# Altium PCB Optocouplers.PcbDoc (part 2 of 2)
Units mm, origin at the board's own origin, x right, y up, seen from the top; angles counter-clockwise.
Board outline 43.2 x 24.15 mm, 4 copper layers (Top Layer, Layer 1, Layer 2, Bottom Layer), stack 1.553 mm thick; 116 components, 82 nets, 391 pads, 180 vias.
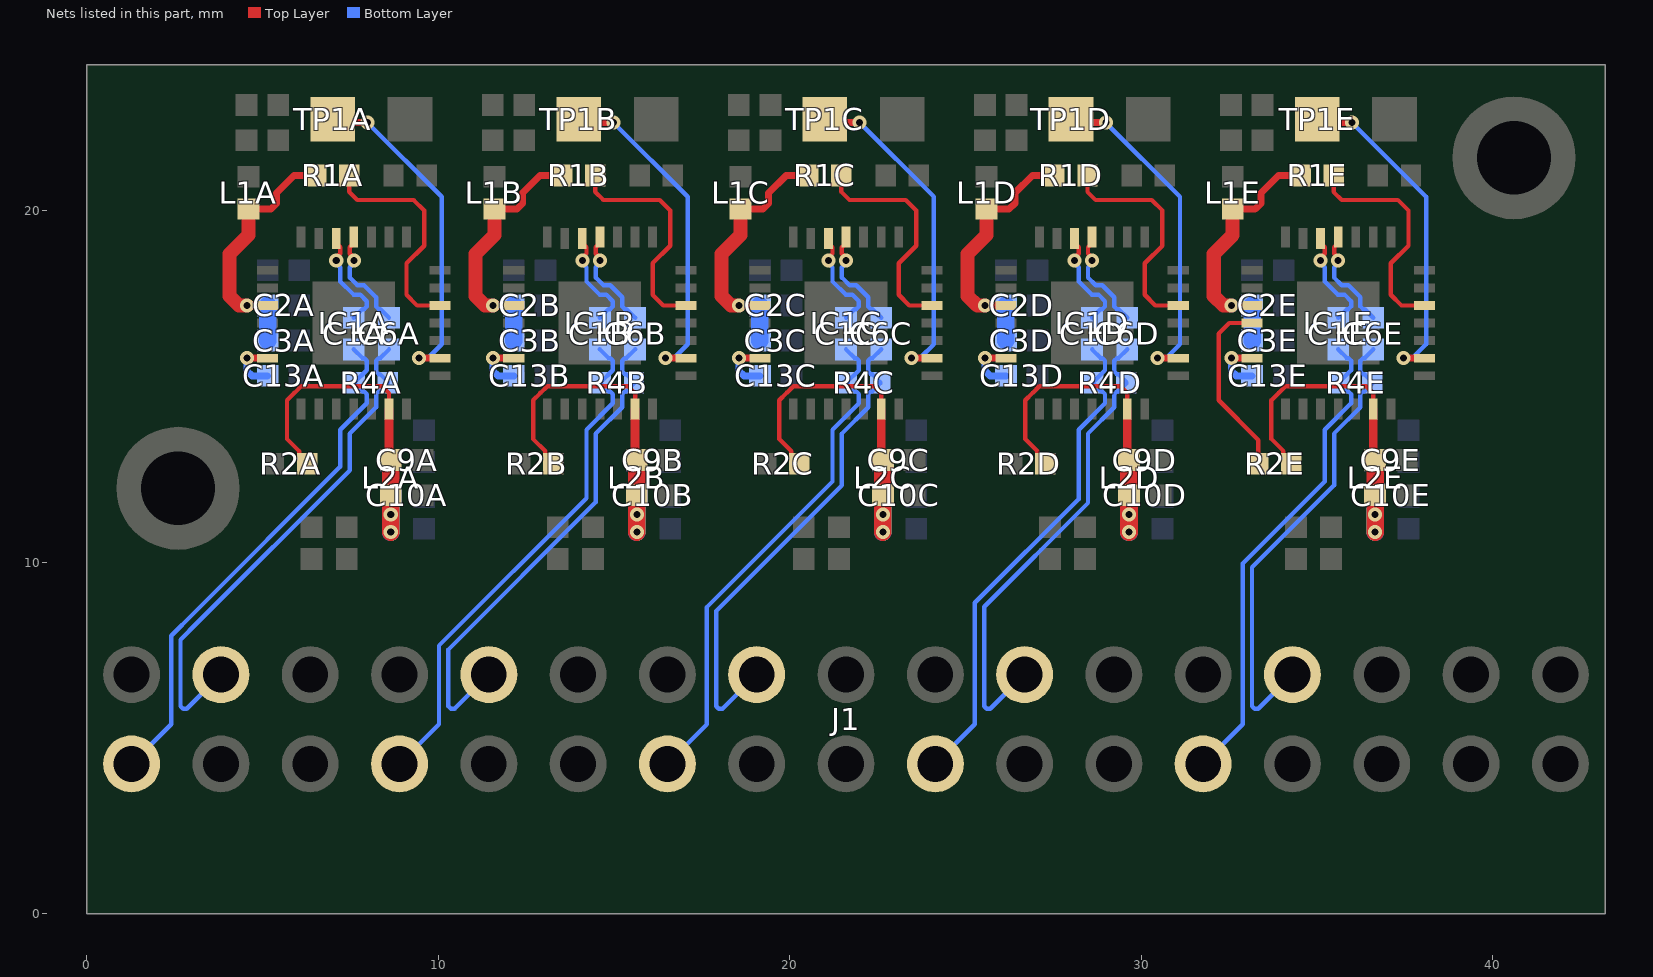
[diagram p4: the nets of this part, all layers, seen from the top]

## Via types
v1: diameter 0.4, hole 0.2, Top Layer to Bottom Layer, tented both sides, 180 vias

## Nets (pads, with @x,y where several pads share a name; then routed paths per layer and width w, separated by ;. In a path a pad name is that pad's centre, name@x,y a point inside that pad or via, vN(x,y) a via of type N, cw(c..) or ccw(c..) an arc to the next point about the centre after c; other vN are vias at no path point) (continued)
RX_ENE: IC1E.25 R2E.2 | length 5.2
  Top Layer w0.125: IC1E.25@33.15,16.8 32.5,16.8 32.2,16.5 32.2,15.953 32.197,15.95 32.197,15.65 32.2,15.647 32.2,14.6 33.33,13.47 R2E.2@33.33,12.8
SDA: IC1A.9 TP1A.1 | length 9.6
  Top Layer w0.2: TP1A.1@7,22.5 v1(7.99,22.5) ; v1(9.46,15.8) IC1A.9@10.05,15.8
  Bottom Layer w0.125: v1(7.99,22.5) 10.1,20.39 10.1,16.2 9.729,15.829 9.489,15.829 v1(9.46,15.8)
SDB: IC1B.9 TP1B.1 | length 9.6
  Top Layer w0.2: TP1B.1@14,22.5 v1(14.99,22.5) ; v1(16.46,15.8) IC1B.9@17.05,15.8
  Bottom Layer w0.125: v1(14.99,22.5) 17.1,20.39 17.1,16.2 16.729,15.829 16.489,15.829 v1(16.46,15.8)
SDC: IC1C.9 TP1C.1 | length 9.6
  Top Layer w0.2: TP1C.1@21,22.5 v1(21.99,22.5) ; v1(23.46,15.8) IC1C.9@24.05,15.8
  Bottom Layer w0.125: v1(21.99,22.5) 24.1,20.39 24.1,16.2 23.729,15.829 23.489,15.829 v1(23.46,15.8)
SDD: IC1D.9 TP1D.1 | length 9.6
  Top Layer w0.2: TP1D.1@28,22.5 v1(28.99,22.5) ; v1(30.46,15.8) IC1D.9@31.05,15.8
  Bottom Layer w0.125: v1(28.99,22.5) 31.1,20.39 31.1,16.2 30.729,15.829 30.489,15.829 v1(30.46,15.8)
SDE: IC1E.9 TP1E.1 | length 9.6
  Top Layer w0.2: TP1E.1@35,22.5 v1(35.99,22.5) ; v1(37.46,15.8) IC1E.9@38.05,15.8
  Bottom Layer w0.125: v1(35.99,22.5) 38.1,20.39 38.1,16.2 37.729,15.829 37.489,15.829 v1(37.46,15.8)
TX_1_N: C6A.2 J1.3 R4A.1 | length 14.5
  Bottom Layer w0.125: J1.3@3.82,6.8 2.847,5.827 2.743,5.827 2.67,5.9 2.67,7.794 3.163,8.287 7.483,12.607 7.483,13.656 8.233,14.406 8.233,14.779 8.306,14.853 8.343,14.853 8.57,15.08 8.57,15.12 8.343,15.347 8.306,15.347 8.233,15.421 8.233,15.729 8.306,15.803 8.353,15.803 C6A.2@8.6,16.05
TX_1_P: C1A.2 J1.2 R4A.2 | length 15
  Bottom Layer w0.125: J1.2@1.28,4.26 2.404,5.384 2.404,7.904 3.053,8.552 7.217,12.717 7.217,13.766 7.967,14.516 7.967,14.779 7.894,14.853 7.857,14.853 7.63,15.08 7.63,15.12 7.967,15.457 7.967,15.729 7.894,15.803 7.847,15.803 C1A.2@7.6,16.05
TX_2_N: C6B.2 J1.9 R4B.1 | length 14.3
  Bottom Layer w0.125: J1.9@11.44,6.8 10.467,5.827 10.363,5.827 10.29,5.9 10.29,7.514 14.483,11.707 14.483,13.656 15.233,14.406 15.233,14.779 15.306,14.853 15.343,14.853 15.57,15.08 15.57,15.12 15.343,15.347 15.306,15.347 15.233,15.421 15.233,15.729 15.306,15.803 15.353,15.803 C6B.2@15.6,16.05
TX_2_P: C1B.2 J1.8 R4B.2 | length 14.8
  Bottom Layer w0.125: J1.8@8.9,4.26 10.024,5.384 10.024,7.624 14.217,11.817 14.217,13.766 14.967,14.516 14.967,14.779 14.894,14.853 14.857,14.853 14.63,15.08 14.63,15.12 14.967,15.457 14.967,15.729 14.894,15.803 14.847,15.803 C1B.2@14.6,16.05
TX_3_N: C6C.2 J1.15 R4C.1 | length 14
  Bottom Layer w0.125: J1.15@19.06,6.8 18.087,5.827 17.983,5.827 17.91,5.9 17.91,8.61 21.483,12.183 21.483,13.656 22.233,14.406 22.233,14.779 22.306,14.853 22.343,14.853 22.57,15.08 22.57,15.12 22.343,15.347 22.306,15.347 22.233,15.421 22.233,15.729 22.306,15.803 22.353,15.803 C6C.2@22.6,16.05
TX_3_P: C1C.2 J1.14 R4C.2 | length 14.5
  Bottom Layer w0.125: J1.14@16.52,4.26 17.644,5.384 17.644,8.72 21.217,12.293 21.217,13.766 21.967,14.516 21.967,14.779 21.894,14.853 21.857,14.853 21.63,15.08 21.63,15.12 21.967,15.457 21.967,15.729 21.894,15.803 21.847,15.803 C1C.2@21.6,16.05
TX_4_N: C6D.2 J1.21 R4D.1 | length 13.8
  Bottom Layer w0.125: J1.21@26.68,6.8 25.707,5.827 25.603,5.827 25.53,5.9 25.53,8.73 28.483,11.683 28.483,13.656 29.233,14.406 29.233,14.779 29.306,14.853 29.343,14.853 29.57,15.08 29.57,15.12 29.343,15.347 29.306,15.347 29.233,15.421 29.233,15.729 29.306,15.803 29.353,15.803 C6D.2@29.6,16.05
TX_4_P: C1D.2 J1.20 R4D.2 | length 14.3
  Bottom Layer w0.125: J1.20@24.14,4.26 25.264,5.384 25.264,8.84 28.217,11.793 28.217,13.766 28.967,14.516 28.967,14.779 28.894,14.853 28.857,14.853 28.63,15.08 28.63,15.12 28.967,15.457 28.967,15.729 28.894,15.803 28.847,15.803 C1D.2@28.6,16.05
TX_5_N: C6E.2 J1.27 R4E.1 | length 13.5
  Bottom Layer w0.125: J1.27@34.3,6.8 33.327,5.827 33.223,5.827 33.15,5.9 33.15,9.85 35.483,12.183 35.483,13.656 36.233,14.406 36.233,14.779 36.306,14.853 36.343,14.853 36.57,15.08 36.57,15.12 36.343,15.347 36.306,15.347 36.233,15.421 36.233,15.729 36.306,15.803 36.353,15.803 C6E.2@36.6,16.05
TX_5_P: C1E.2 J1.26 R4E.2 | length 14
  Bottom Layer w0.125: J1.26@31.76,4.26 32.884,5.384 32.884,9.96 35.217,12.293 35.217,13.766 35.967,14.516 35.967,14.779 35.894,14.853 35.857,14.853 35.63,15.08 35.63,15.12 35.967,15.457 35.967,15.729 35.894,15.803 35.847,15.803 C1E.2@35.6,16.05
TX_CA_N: C6A.1 IC1A.18 | length 3
  Top Layer w0.125: v1(7.6,18.578) 7.6,18.652 7.483,18.77 7.483,18.958 7.6,19.075 IC1A.18@7.6,19.25
  Bottom Layer w0.125: v1(7.6,18.578) 7.6,18.504 7.483,18.386 7.483,18.093 7.701,17.874 7.891,17.874 8.233,17.532 8.233,17.271 8.306,17.197 8.353,17.197 C6A.1@8.6,16.95
TX_CA_P: C1A.1 IC1A.19 | length 3
  Top Layer w0.125: v1(7.1,18.578) 7.1,18.652 7.217,18.77 7.217,18.958 7.1,19.075 IC1A.19@7.1,19.25
  Bottom Layer w0.125: v1(7.1,18.578) 7.1,18.504 7.217,18.386 7.217,17.983 7.591,17.609 7.781,17.609 7.967,17.422 7.967,17.271 7.894,17.197 7.847,17.197 C1A.1@7.6,16.95
TX_CB_N: C6B.1 IC1B.18 | length 3
  Top Layer w0.125: v1(14.6,18.578) 14.6,18.652 14.483,18.77 14.483,18.958 14.6,19.075 IC1B.18@14.6,19.25
  Bottom Layer w0.125: v1(14.6,18.578) 14.6,18.504 14.483,18.386 14.483,18.093 14.701,17.874 14.891,17.874 15.233,17.532 15.233,17.271 15.306,17.197 15.353,17.197 C6B.1@15.6,16.95
TX_CB_P: C1B.1 IC1B.19 | length 3
  Top Layer w0.125: v1(14.1,18.578) 14.1,18.652 14.217,18.77 14.217,18.958 14.1,19.075 IC1B.19@14.1,19.25
  Bottom Layer w0.125: v1(14.1,18.578) 14.1,18.504 14.217,18.386 14.217,17.983 14.591,17.609 14.781,17.609 14.967,17.422 14.967,17.271 14.894,17.197 14.847,17.197 C1B.1@14.6,16.95
TX_CC_N: C6C.1 IC1C.18 | length 3
  Top Layer w0.125: v1(21.6,18.578) 21.6,18.652 21.483,18.77 21.483,18.958 21.6,19.075 IC1C.18@21.6,19.25
  Bottom Layer w0.125: v1(21.6,18.578) 21.6,18.504 21.483,18.386 21.483,18.093 21.701,17.874 21.891,17.874 22.233,17.532 22.233,17.271 22.306,17.197 22.353,17.197 C6C.1@22.6,16.95
TX_CC_P: C1C.1 IC1C.19 | length 3
  Top Layer w0.125: v1(21.1,18.578) 21.1,18.652 21.217,18.77 21.217,18.958 21.1,19.075 IC1C.19@21.1,19.25
  Bottom Layer w0.125: v1(21.1,18.578) 21.1,18.504 21.217,18.386 21.217,17.983 21.591,17.609 21.781,17.609 21.967,17.422 21.967,17.271 21.894,17.197 21.847,17.197 C1C.1@21.6,16.95
TX_CD_N: C6D.1 IC1D.18 | length 3
  Top Layer w0.125: v1(28.6,18.578) 28.6,18.652 28.483,18.77 28.483,18.958 28.6,19.075 IC1D.18@28.6,19.25
  Bottom Layer w0.125: v1(28.6,18.578) 28.6,18.504 28.483,18.386 28.483,18.093 28.701,17.874 28.891,17.874 29.233,17.532 29.233,17.271 29.306,17.197 29.353,17.197 C6D.1@29.6,16.95
TX_CD_P: C1D.1 IC1D.19 | length 3
  Top Layer w0.125: v1(28.1,18.578) 28.1,18.652 28.217,18.77 28.217,18.958 28.1,19.075 IC1D.19@28.1,19.25
  Bottom Layer w0.125: v1(28.1,18.578) 28.1,18.504 28.217,18.386 28.217,17.983 28.591,17.609 28.781,17.609 28.967,17.422 28.967,17.271 28.894,17.197 28.847,17.197 C1D.1@28.6,16.95
TX_CE_N: C6E.1 IC1E.18 | length 3
  Top Layer w0.125: v1(35.6,18.578) 35.6,18.652 35.483,18.77 35.483,18.958 35.6,19.075 IC1E.18@35.6,19.25
  Bottom Layer w0.125: v1(35.6,18.578) 35.6,18.504 35.483,18.386 35.483,18.093 35.701,17.874 35.891,17.874 36.233,17.532 36.233,17.271 36.306,17.197 36.353,17.197 C6E.1@36.6,16.95
TX_CE_P: C1E.1 IC1E.19 | length 3
  Top Layer w0.125: v1(35.1,18.578) 35.1,18.652 35.217,18.77 35.217,18.958 35.1,19.075 IC1E.19@35.1,19.25
  Bottom Layer w0.125: v1(35.1,18.578) 35.1,18.504 35.217,18.386 35.217,17.983 35.591,17.609 35.781,17.609 35.967,17.422 35.967,17.271 35.894,17.197 35.847,17.197 C1E.1@35.6,16.95
TX_ENA: IC1A.12 R1A.2 | length 6.5
  Top Layer w0.125: R1A.2@7.47,21 7.47,20.53 7.7,20.3 9.3,20.3 9.6,20 9.6,19 9.098,18.498 9.098,17.602 9.4,17.3 IC1A.12@10.05,17.3
TX_ENB: IC1B.12 R1B.2 | length 6.5
  Top Layer w0.125: R1B.2@14.47,21 14.47,20.53 14.7,20.3 16.3,20.3 16.6,20 16.6,19 16.098,18.498 16.098,17.602 16.4,17.3 IC1B.12@17.05,17.3
TX_ENC: IC1C.12 R1C.2 | length 6.5
  Top Layer w0.125: R1C.2@21.47,21 21.47,20.53 21.7,20.3 23.3,20.3 23.6,20 23.6,19 23.098,18.498 23.098,17.602 23.4,17.3 IC1C.12@24.05,17.3
TX_END: IC1D.12 R1D.2 | length 6.5
  Top Layer w0.125: R1D.2@28.47,21 28.47,20.53 28.7,20.3 30.3,20.3 30.6,20 30.6,19 30.098,18.498 30.098,17.602 30.4,17.3 IC1D.12@31.05,17.3
TX_ENE: IC1E.12 R1E.2 | length 6.5
  Top Layer w0.125: R1E.2@35.47,21 35.47,20.53 35.7,20.3 37.3,20.3 37.6,20 37.6,19 37.098,18.498 37.098,17.602 37.4,17.3 IC1E.12@38.05,17.3
VDD15A: C13A.2 IC1A.27 | length 1.6
  Top Layer w0.2: v1(4.56,15.8) IC1A.27@5.15,15.8
  Bottom Layer w0.2: v1(4.56,15.8) 4.56,15.44 4.7,15.3 C13A.2@5.15,15.3
VDD15B: C13B.2 IC1B.27 | length 1.6
  Top Layer w0.2: v1(11.56,15.8) IC1B.27@12.15,15.8
  Bottom Layer w0.2: v1(11.56,15.8) 11.56,15.44 11.7,15.3 C13B.2@12.15,15.3
VDD15C: C13C.2 IC1C.27 | length 1.6
  Top Layer w0.2: v1(18.56,15.8) IC1C.27@19.15,15.8
  Bottom Layer w0.2: v1(18.56,15.8) 18.56,15.44 18.7,15.3 C13C.2@19.15,15.3
VDD15D: C13D.2 IC1D.27 | length 1.6
  Top Layer w0.2: v1(25.56,15.8) IC1D.27@26.15,15.8
  Bottom Layer w0.2: v1(25.56,15.8) 25.56,15.44 25.7,15.3 C13D.2@26.15,15.3
VDD15E: C13E.2 IC1E.27 | length 1.6
  Top Layer w0.2: v1(32.56,15.8) IC1E.27@33.15,15.8
  Bottom Layer w0.2: v1(32.56,15.8) 32.56,15.44 32.7,15.3 C13E.2@33.15,15.3
VDD_RXA: C9A.2 C10A.2 IC1A.6 L2A.1 R2A.1 | length 10.3
  Top Layer w0.125: R2A.1@6.27,12.8 6.043,13.027 6.043,13.157 5.7,13.5 5.7,14.605 5.908,14.812 5.912,14.812 6.1,15 8.4,15 8.6,14.8 IC1A.6@8.6,14.35
  Top Layer w0.25: IC1A.6@8.6,14.35 8.6,12.95 C9A.2@8.65,12.9
  Top Layer w0.5: v1(8.65,10.85) v1(8.65,11.35) C10A.2@8.65,11.9 C9A.2@8.65,12.9
  Bottom Layer w0.5: L2A.1@8.6,11.94 8.65,11.89 v1(8.65,11.35) v1(8.65,10.85)
VDD_RXB: C9B.2 C10B.2 IC1B.6 L2B.1 R2B.1 | length 10.3
  Top Layer w0.125: R2B.1@13.27,12.8 13.043,13.027 13.043,13.157 12.7,13.5 12.7,14.605 12.908,14.812 12.912,14.812 13.1,15 15.4,15 15.6,14.8 IC1B.6@15.6,14.35
  Top Layer w0.25: IC1B.6@15.6,14.35 15.6,12.95 C9B.2@15.65,12.9
  Top Layer w0.5: v1(15.65,10.85) v1(15.65,11.35) C10B.2@15.65,11.9 C9B.2@15.65,12.9
  Bottom Layer w0.5: L2B.1@15.6,11.94 15.65,11.89 v1(15.65,11.35) v1(15.65,10.85)
VDD_RXC: C9C.2 C10C.2 IC1C.6 L2C.1 R2C.1 | length 10.3
  Top Layer w0.125: R2C.1@20.27,12.8 20.043,13.027 20.043,13.157 19.7,13.5 19.7,14.605 19.908,14.812 19.912,14.812 20.1,15 22.4,15 22.6,14.8 IC1C.6@22.6,14.35
  Top Layer w0.25: IC1C.6@22.6,14.35 22.6,12.95 C9C.2@22.65,12.9
  Top Layer w0.5: v1(22.65,10.85) v1(22.65,11.35) C10C.2@22.65,11.9 C9C.2@22.65,12.9
  Bottom Layer w0.5: L2C.1@22.6,11.94 22.65,11.89 v1(22.65,11.35) v1(22.65,10.85)
VDD_RXD: C9D.2 C10D.2 IC1D.6 L2D.1 R2D.1 | length 10.3
  Top Layer w0.125: R2D.1@27.27,12.8 27.043,13.027 27.043,13.157 26.7,13.5 26.7,14.605 26.908,14.812 26.912,14.812 27.1,15 29.4,15 29.6,14.8 IC1D.6@29.6,14.35
  Top Layer w0.25: IC1D.6@29.6,14.35 29.6,12.95 C9D.2@29.65,12.9
  Top Layer w0.5: v1(29.65,10.85) v1(29.65,11.35) C10D.2@29.65,11.9 C9D.2@29.65,12.9
  Bottom Layer w0.5: L2D.1@29.6,11.94 29.65,11.89 v1(29.65,11.35) v1(29.65,10.85)
VDD_RXE: C9E.2 C10E.2 IC1E.6 L2E.1 R2E.1 | length 10.3
  Top Layer w0.125: R2E.1@34.27,12.8 34.043,13.027 34.043,13.157 33.7,13.5 33.7,14.605 33.908,14.812 33.912,14.812 34.1,15 36.4,15 36.6,14.8 IC1E.6@36.6,14.35
  Top Layer w0.25: IC1E.6@36.6,14.35 36.6,12.95 C9E.2@36.65,12.9
  Top Layer w0.5: v1(36.65,10.85) v1(36.65,11.35) C10E.2@36.65,11.9 C9E.2@36.65,12.9
  Bottom Layer w0.5: L2E.1@36.6,11.94 36.65,11.89 v1(36.65,11.35) v1(36.65,10.85)
VDD_TXA: C2A.2 C3A.2 IC1A.24 L1A.1 R1A.1 | length 8
  Top Layer w0.2: v1(4.56,17.3) IC1A.24@5.15,17.3 ; L1A.1@4.6,20.04 5.24,20.04 5.4,20.2 5.4,20.5 5.9,21 R1A.1@6.53,21
  Top Layer w0.4: v1(4.56,17.3) 4.334,17.3 4.06,17.574 4.06,18.76 4.6,19.3 L1A.1@4.6,20.04
  Bottom Layer w0.2: v1(4.56,17.3) C2A.2@5.15,17.3
  Bottom Layer w0.5: C3A.2@5.15,16.3 C2A.2@5.15,17.3
VDD_TXB: C2B.2 C3B.2 IC1B.24 L1B.1 R1B.1 | length 8
  Top Layer w0.2: v1(11.56,17.3) IC1B.24@12.15,17.3 ; L1B.1@11.6,20.04 12.24,20.04 12.4,20.2 12.4,20.5 12.9,21 R1B.1@13.53,21
  Top Layer w0.4: v1(11.56,17.3) 11.334,17.3 11.06,17.574 11.06,18.76 11.6,19.3 L1B.1@11.6,20.04
  Bottom Layer w0.2: v1(11.56,17.3) C2B.2@12.15,17.3
  Bottom Layer w0.5: C3B.2@12.15,16.3 C2B.2@12.15,17.3
VDD_TXC: C2C.2 C3C.2 IC1C.24 L1C.1 R1C.1 | length 8
  Top Layer w0.2: v1(18.56,17.3) IC1C.24@19.15,17.3 ; L1C.1@18.6,20.04 19.24,20.04 19.4,20.2 19.4,20.5 19.9,21 R1C.1@20.53,21
  Top Layer w0.4: v1(18.56,17.3) 18.334,17.3 18.06,17.574 18.06,18.76 18.6,19.3 L1C.1@18.6,20.04
  Bottom Layer w0.2: v1(18.56,17.3) C2C.2@19.15,17.3
  Bottom Layer w0.5: C3C.2@19.15,16.3 C2C.2@19.15,17.3
VDD_TXD: C2D.2 C3D.2 IC1D.24 L1D.1 R1D.1 | length 8
  Top Layer w0.2: v1(25.56,17.3) IC1D.24@26.15,17.3 ; L1D.1@25.6,20.04 26.24,20.04 26.4,20.2 26.4,20.5 26.9,21 R1D.1@27.53,21
  Top Layer w0.4: v1(25.56,17.3) 25.334,17.3 25.06,17.574 25.06,18.76 25.6,19.3 L1D.1@25.6,20.04
  Bottom Layer w0.2: v1(25.56,17.3) C2D.2@26.15,17.3
  Bottom Layer w0.5: C3D.2@26.15,16.3 C2D.2@26.15,17.3
VDD_TXE: C2E.2 C3E.2 IC1E.24 L1E.1 R1E.1 | length 8
  Top Layer w0.2: v1(32.56,17.3) IC1E.24@33.15,17.3 ; L1E.1@32.6,20.04 33.24,20.04 33.4,20.2 33.4,20.5 33.9,21 R1E.1@34.53,21
  Top Layer w0.4: v1(32.56,17.3) 32.334,17.3 32.06,17.574 32.06,18.76 32.6,19.3 L1E.1@32.6,20.04
  Bottom Layer w0.2: v1(32.56,17.3) C2E.2@33.15,17.3
  Bottom Layer w0.5: C3E.2@33.15,16.3 C2E.2@33.15,17.3
pads on no net: IC1A.11 IC1A.13 IC1A.16 IC1A.26 IC1B.11 IC1B.13 IC1B.16 IC1B.26 IC1C.11 IC1C.13 IC1C.16 IC1C.26 IC1D.11 IC1D.13 IC1D.16 IC1D.26 IC1E.11 IC1E.13 IC1E.16 IC1E.26

## Polygon pours and split planes (outlines as drawn)
GND on Bottom Layer "GND_L04_P013" (solid, pour order 13): 34.36,15.425 34.535,15.6 34.7,15.6 34.9,15.8 34.9,17.9 34.8,18 34.6,18 34.36,18.24 34.36,18.61 33.74,18.61 33.74,14.99 34.36,14.99
GND on Bottom Layer "GND_L04_P031" (solid, pour order 31): 37.29,11.26 37.29,10.59 37.1,10.4 36.6,10.4 36.5,10.3 36.5,9.9 36.6,9.8 37.8,9.8 37.91,9.91 37.91,11.26
P3V3 on Bottom Layer "P3V3_L04_P040" (solid, pour order 40): 36.29,13.16 36.29,12.56 36.91,12.56 37.29,12.18 37.29,11.54 38.34,11.54 38.5,11.7 38.5,13 38.34,13.16 37.91,13.16
GND on Bottom Layer "GND_L04_P012" (solid, pour order 12): 27.36,15.425 27.535,15.6 27.7,15.6 27.9,15.8 27.9,17.9 27.8,18 27.6,18 27.36,18.24 27.36,18.61 26.74,18.61 26.74,14.99 27.36,14.99
GND on Bottom Layer "GND_L04_P030" (solid, pour order 30): 30.29,11.26 30.29,10.59 30.1,10.4 29.6,10.4 29.5,10.3 29.5,9.9 29.6,9.8 30.8,9.8 30.91,9.91 30.91,11.26
P3V3 on Bottom Layer "P3V3_L04_P039" (solid, pour order 39): 29.29,13.16 29.29,12.56 29.91,12.56 30.29,12.18 30.29,11.54 31.34,11.54 31.5,11.7 31.5,13 31.34,13.16 30.91,13.16
GND on Bottom Layer "GND_L04_P011" (solid, pour order 11): 20.36,15.425 20.535,15.6 20.7,15.6 20.9,15.8 20.9,17.9 20.8,18 20.6,18 20.36,18.24 20.36,18.61 19.74,18.61 19.74,14.99 20.36,14.99
GND on Bottom Layer "GND_L04_P029" (solid, pour order 29): 23.29,11.26 23.29,10.59 23.1,10.4 22.6,10.4 22.5,10.3 22.5,9.9 22.6,9.8 23.8,9.8 23.91,9.91 23.91,11.26
P3V3 on Bottom Layer "P3V3_L04_P038" (solid, pour order 38): 22.29,13.16 22.29,12.56 22.91,12.56 23.29,12.18 23.29,11.54 24.34,11.54 24.5,11.7 24.5,13 24.34,13.16 23.91,13.16
GND on Bottom Layer "GND_L04_P010" (solid, pour order 10): 13.36,15.425 13.535,15.6 13.7,15.6 13.9,15.8 13.9,17.9 13.8,18 13.6,18 13.36,18.24 13.36,18.61 12.74,18.61 12.74,14.99 13.36,14.99
GND on Bottom Layer "GND_L04_P028" (solid, pour order 28): 16.29,11.26 16.29,10.59 16.1,10.4 15.6,10.4 15.5,10.3 15.5,9.9 15.6,9.8 16.8,9.8 16.91,9.91 16.91,11.26
P3V3 on Bottom Layer "P3V3_L04_P037" (solid, pour order 37): 15.29,13.16 15.29,12.56 15.91,12.56 16.29,12.18 16.29,11.54 17.34,11.54 17.5,11.7 17.5,13 17.34,13.16 16.91,13.16
P3V3 on Bottom Layer "P3V3_L04_P036" (solid, pour order 36): 36.29,13.16 36.29,12.56 36.91,12.56 37.29,12.18 37.29,11.54 38.34,11.54 38.5,11.7 38.5,13 38.34,13.16 37.91,13.16
GND on Bottom Layer "GND_L04_P009" (solid, pour order 9): 34.36,15.425 34.535,15.6 34.7,15.6 34.9,15.8 34.9,17.9 34.8,18 34.6,18 34.36,18.24 34.36,18.61 33.74,18.61 33.74,14.99 34.36,14.99
GND on Bottom Layer "GND_L04_P027" (solid, pour order 27): 37.29,11.26 37.29,10.59 37.1,10.4 36.6,10.4 36.5,10.3 36.5,9.9 36.6,9.8 37.8,9.8 37.91,9.91 37.91,11.26
P3V3 on Bottom Layer "P3V3_L04_P035" (solid, pour order 35): 29.29,13.16 29.29,12.56 29.91,12.56 30.29,12.18 30.29,11.54 31.34,11.54 31.5,11.7 31.5,13 31.34,13.16 30.91,13.16
GND on Bottom Layer "GND_L04_P008" (solid, pour order 8): 27.36,15.425 27.535,15.6 27.7,15.6 27.9,15.8 27.9,17.9 27.8,18 27.6,18 27.36,18.24 27.36,18.61 26.74,18.61 26.74,14.99 27.36,14.99
GND on Bottom Layer "GND_L04_P026" (solid, pour order 26): 30.29,11.26 30.29,10.59 30.1,10.4 29.6,10.4 29.5,10.3 29.5,9.9 29.6,9.8 30.8,9.8 30.91,9.91 30.91,11.26
P3V3 on Bottom Layer "P3V3_L04_P034" (solid, pour order 34): 22.29,13.16 22.29,12.56 22.91,12.56 23.29,12.18 23.29,11.54 24.34,11.54 24.5,11.7 24.5,13 24.34,13.16 23.91,13.16
GND on Bottom Layer "GND_L04_P007" (solid, pour order 7): 20.36,15.425 20.535,15.6 20.7,15.6 20.9,15.8 20.9,17.9 20.8,18 20.6,18 20.36,18.24 20.36,18.61 19.74,18.61 19.74,14.99 20.36,14.99
GND on Bottom Layer "GND_L04_P025" (solid, pour order 25): 23.29,11.26 23.29,10.59 23.1,10.4 22.6,10.4 22.5,10.3 22.5,9.9 22.6,9.8 23.8,9.8 23.91,9.91 23.91,11.26
P3V3 on Bottom Layer "P3V3_L04_P033" (solid, pour order 33): 15.29,13.16 15.29,12.56 15.91,12.56 16.29,12.18 16.29,11.54 17.34,11.54 17.5,11.7 17.5,13 17.34,13.16 16.91,13.16
GND on Bottom Layer "GND_L04_P006" (solid, pour order 6): 13.36,15.425 13.535,15.6 13.7,15.6 13.9,15.8 13.9,17.9 13.8,18 13.6,18 13.36,18.24 13.36,18.61 12.74,18.61 12.74,14.99 13.36,14.99
GND on Bottom Layer "GND_L04_P024" (solid, pour order 24): 16.29,11.26 16.29,10.59 16.1,10.4 15.6,10.4 15.5,10.3 15.5,9.9 15.6,9.8 16.8,9.8 16.91,9.91 16.91,11.26
P3V3 on Bottom Layer "P3V3_L04_P032" (solid, pour order 32): 8.29,13.16 8.29,12.56 8.91,12.56 9.29,12.18 9.29,11.54 10.34,11.54 10.5,11.7 10.5,13 10.34,13.16 9.91,13.16
GND on Bottom Layer "GND_L04_P023" (solid, pour order 23): 9.29,11.26 9.29,10.59 9.1,10.4 8.6,10.4 8.5,10.3 8.5,9.9 8.6,9.8 9.8,9.8 9.91,9.91 9.91,11.26
GND on Bottom Layer "GND_L04_P005" (solid, pour order 5): 6.36,15.425 6.535,15.6 6.7,15.6 6.9,15.8 6.9,17.9 6.8,18 6.6,18 6.36,18.24 6.36,18.61 5.74,18.61 5.74,14.99 6.36,14.99
GND on Top Layer "GND_L01_P022" (solid, pour order 22): 37.72,9.8 37.86,9.94 37.86,14.44 37.65,14.65 36.975,14.65 36.975,13.475 37.24,13.21 37.24,10.54 37.1,10.4 36.6,10.4 36.5,10.3 36.5,9.9 36.6,9.8
P3V3 on Top Layer "P3V3_L01_P045" (solid, pour order 45): 32.91,20.66 32.91,21.64 32.86,21.69 32.86,23.31 31.51,23.31 31.4,23.2 31.4,21.9 31.6,21.7 32.23,21.7 32.29,21.64 32.29,20.66
GND on Top Layer "GND_L01_P021" (solid, pour order 21): 30.72,9.8 30.86,9.94 30.86,14.44 30.65,14.65 29.975,14.65 29.975,13.475 30.24,13.21 30.24,10.54 30.1,10.4 29.6,10.4 29.5,10.3 29.5,9.9 29.6,9.8
P3V3 on Top Layer "P3V3_L01_P044" (solid, pour order 44): 25.91,20.66 25.91,21.64 25.86,21.69 25.86,23.31 24.51,23.31 24.4,23.2 24.4,21.9 24.6,21.7 25.23,21.7 25.29,21.64 25.29,20.66
GND on Top Layer "GND_L01_P020" (solid, pour order 20): 23.72,9.8 23.86,9.94 23.86,14.44 23.65,14.65 22.975,14.65 22.975,13.475 23.24,13.21 23.24,10.54 23.1,10.4 22.6,10.4 22.5,10.3 22.5,9.9 22.6,9.8
P3V3 on Top Layer "P3V3_L01_P043" (solid, pour order 43): 18.91,20.66 18.91,21.64 18.86,21.69 18.86,23.31 17.51,23.31 17.4,23.2 17.4,21.9 17.6,21.7 18.23,21.7 18.29,21.64 18.29,20.66
GND on Top Layer "GND_L01_P019" (solid, pour order 19): 16.72,9.8 16.86,9.94 16.86,14.44 16.65,14.65 15.975,14.65 15.975,13.475 16.24,13.21 16.24,10.54 16.1,10.4 15.6,10.4 15.5,10.3 15.5,9.9 15.6,9.8
P3V3 on Top Layer "P3V3_L01_P042" (solid, pour order 42): 11.91,20.66 11.91,21.64 11.86,21.69 11.86,23.31 10.51,23.31 10.4,23.2 10.4,21.9 10.6,21.7 11.23,21.7 11.29,21.64 11.29,20.66
P3V3 on Top Layer "P3V3_L01_P041" (solid, pour order 41): 4.91,20.66 4.91,21.64 4.86,21.69 4.86,23.31 3.51,23.31 3.4,23.2 3.4,21.9 3.6,21.7 4.23,21.7 4.29,21.64 4.29,20.66
GND on Top Layer "GND_L01_P018" (solid, pour order 18): 37.72,9.8 37.86,9.94 37.86,14.44 37.65,14.65 36.975,14.65 36.975,13.475 37.24,13.21 37.24,10.54 37.1,10.4 36.6,10.4 36.5,10.3 36.5,9.9 36.6,9.8
GND on Top Layer "GND_L01_P017" (solid, pour order 17): 30.72,9.8 30.86,9.94 30.86,14.44 30.65,14.65 29.975,14.65 29.975,13.475 30.24,13.21 30.24,10.54 30.1,10.4 29.6,10.4 29.5,10.3 29.5,9.9 29.6,9.8
GND on Top Layer "GND_L01_P016" (solid, pour order 16): 23.72,9.8 23.86,9.94 23.86,14.44 23.65,14.65 22.975,14.65 22.975,13.475 23.24,13.21 23.24,10.54 23.1,10.4 22.6,10.4 22.5,10.3 22.5,9.9 22.6,9.8
GND on Top Layer "GND_L01_P015" (solid, pour order 15): 16.72,9.8 16.86,9.94 16.86,14.44 16.65,14.65 15.975,14.65 15.975,13.475 16.24,13.21 16.24,10.54 16.1,10.4 15.6,10.4 15.5,10.3 15.5,9.9 15.6,9.8
GND on Top Layer "GND_L01_P014" (solid, pour order 14): 9.72,9.8 9.86,9.94 9.86,14.44 9.65,14.65 8.975,14.65 8.975,13.475 9.24,13.21 9.24,10.54 9.1,10.4 8.6,10.4 8.5,10.3 8.5,9.9 8.6,9.8
GND on Layer 2 (split plane): 10.298,21.158 10.298,14.142 9.528,13.372 9.506,13.339 9.498,13.3 9.498,12.2 9.498,11.5 9.506,11.461 9.528,11.428 10.028,10.928 10.061,10.906 10.1,10.898 10.8,10.898 10.839,10.906 10.872,10.928 11.572,11.628 11.594,11.661 11.602,11.7 11.602,19.858 12.142,20.398 16.758,20.398 17.298,19.858 17.298,14.142 16.528,13.372 16.506,13.339 16.498,13.3 16.498,12.2 16.498,11.5 16.506,11.461 16.528,11.428 17.028,10.928 17.061,10.906 17.1,10.898 17.8,10.898 17.839,10.906 17.872,10.928 18.572,11.628 18.594,11.661 18.602,11.7 18.602,19.858 19.142,20.398 23.758,20.398 24.298,19.858 24.298,14.142 23.528,13.372 23.506,13.339 23.498,13.3 23.498,12.2 23.498,11.5 23.506,11.461 23.528,11.428 24.028,10.928 24.061,10.906 24.1,10.898 24.8,10.898 24.839,10.906 24.872,10.928 25.572,11.628 25.594,11.661 25.602,11.7 25.602,19.858 26.142,20.398 30.758,20.398 31.298,19.858 31.298,14.142 30.528,13.372 30.506,13.339 30.498,13.3 30.498,12.2 30.498,11.5 30.506,11.461 30.528,11.428 31.028,10.928 31.061,10.906 31.1,10.898 31.8,10.898 31.839,10.906 31.872,10.928 32.572,11.628 32.594,11.661 32.602,11.7 32.602,19.858 33.142,20.398 37.158,20.398 37.898,19.658 37.898,13.842 37.428,13.372 37.406,13.339 37.398,13.3 37.398,11.2 37.406,11.161 37.428,11.128 38.028,10.528 40.398,8.158 40.398,0.51 0.51,0.51 0.51,21.398 10.058,21.398
P3V3 on Layer 2 (split plane): 42.69,0.51 40.602,0.51 40.602,8.2 40.594,8.239 40.572,8.272 38.172,10.672 37.602,11.242 37.602,13.258 38.072,13.728 38.094,13.761 38.102,13.8 38.102,19.7 38.094,19.739 38.072,19.772 37.272,20.572 37.239,20.594 37.2,20.602 33.1,20.602 33.061,20.594 33.028,20.572 32.428,19.972 32.406,19.939 32.398,19.9 32.398,11.742 31.758,11.102 31.142,11.102 30.702,11.542 30.702,12.2 30.702,13.258 31.472,14.028 31.494,14.061 31.502,14.1 31.502,19.9 31.494,19.939 31.472,19.972 30.872,20.572 30.839,20.594 30.8,20.602 26.1,20.602 26.061,20.594 26.028,20.572 25.428,19.972 25.406,19.939 25.398,19.9 25.398,11.742 24.758,11.102 24.142,11.102 23.702,11.542 23.702,12.2 23.702,13.258 24.472,14.028 24.494,14.061 24.502,14.1 24.502,19.9 24.494,19.939 24.472,19.972 23.872,20.572 23.839,20.594 23.8,20.602 19.1,20.602 19.061,20.594 19.028,20.572 18.428,19.972 18.406,19.939 18.398,19.9 18.398,11.742 17.758,11.102 17.142,11.102 16.702,11.542 16.702,12.2 16.702,13.258 17.472,14.028 17.494,14.061 17.502,14.1 17.502,19.9 17.494,19.939 17.472,19.972 16.872,20.572 16.839,20.594 16.8,20.602 12.1,20.602 12.061,20.594 12.028,20.572 11.428,19.972 11.406,19.939 11.398,19.9 11.398,11.742 10.758,11.102 10.142,11.102 9.702,11.542 9.702,12.2 9.702,13.258 10.472,14.028 10.494,14.061 10.502,14.1 10.502,21.2 10.494,21.239 10.472,21.272 10.172,21.572 10.139,21.594 10.1,21.602 0.51,21.602 0.51,23.64 42.69,23.64
GND on Layer 1 (split plane): 42.69,0.51 0.51,0.51 0.51,23.64 42.69,23.64

## Other copper
Layer 2 (plane layer: these items are gaps in the copper):
  lines w0.2: 0,21.5 10.1,21.5 10.4,21.2 10.4,14.1 9.6,13.3 9.6,12.2 9.6,11.5 10.1,11 10.8,11 11.5,11.7 11.5,19.9 12.1,20.5 16.8,20.5 17.4,19.9 17.4,14.1 16.6,13.3 16.6,12.2 16.6,11.5 17.1,11 17.8,11 18.5,11.7 18.5,19.9 19.1,20.5 23.8,20.5 24.4,19.9 24.4,14.1 23.6,13.3 23.6,12.2 23.6,11.5 24.1,11 24.8,11 25.5,11.7 25.5,19.9 26.1,20.5 30.8,20.5 31.4,19.9 31.4,14.1 30.6,13.3 30.6,12.2 30.6,11.5 31.1,11 31.8,11 32.5,11.7 32.5,19.9 33.1,20.5 37.2,20.5 38,19.7 38,13.8 37.5,13.3 37.5,11.2 38.1,10.6 40.5,8.2 40.5,0

## Silkscreen, mask and mechanical layers (free items; w line width, h text height)
Top Overlay:
  text "TX EN" at 6.2,20 h1
  text "TX EN" at 13.2,20 h1
  text "TX EN" at 20.2,20 h1
  text "TX EN" at 27.2,20 h1
  text "TX EN" at 34.2,20 h1
  text "RX EN" at 5,11.8 h1
  text "RX EN" at 12,11.8 h1
  text "RX EN" at 19,11.8 h1
  text "RX EN" at 26,11.8 h1
  text "RX EN" at 33,11.8 h1